# Altium PCB PCB1.PcbDoc
Units mm, origin at the board's own origin, x right, y up, seen from the top; angles counter-clockwise.
Board outline 152.4 x 101.6 mm, 2 copper layers (Top Layer, Bottom Layer); 57 components, 32 nets, 213 pads, 4 vias.
Unrouted connection lines stored in the file: 40.
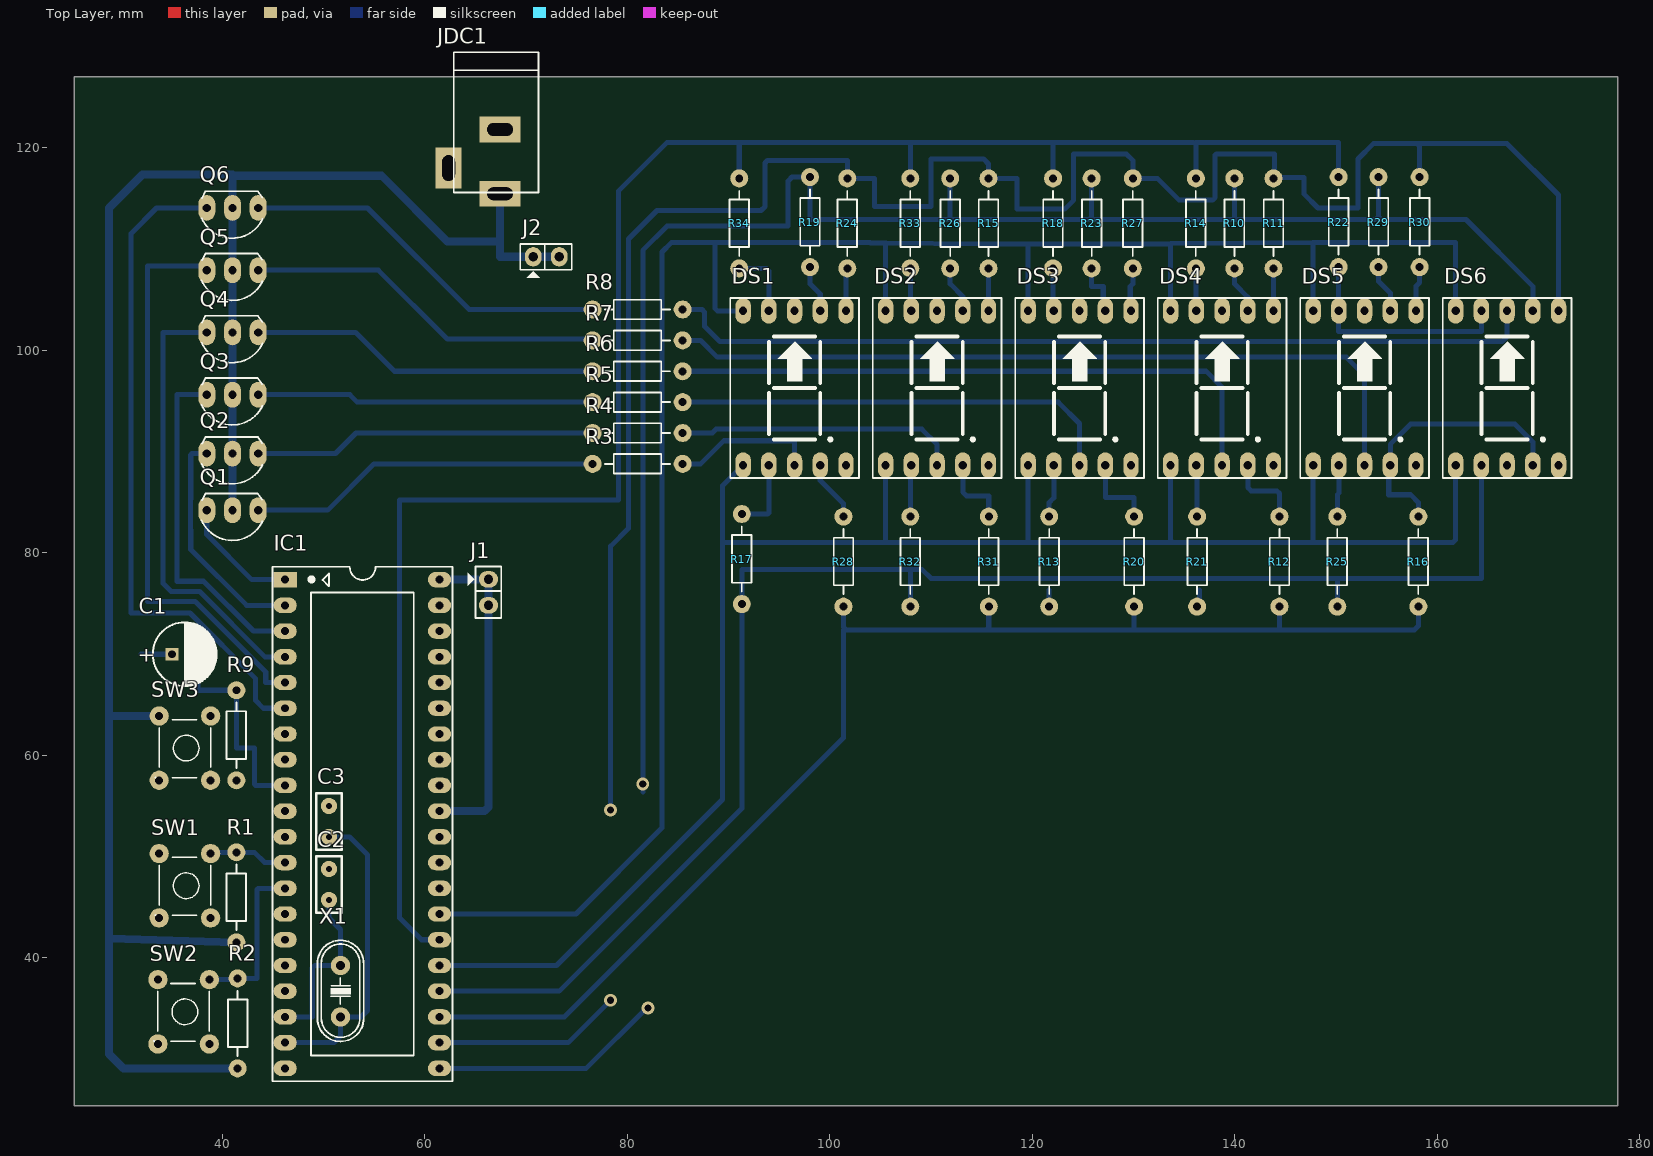
[diagram p0: Top Layer view]
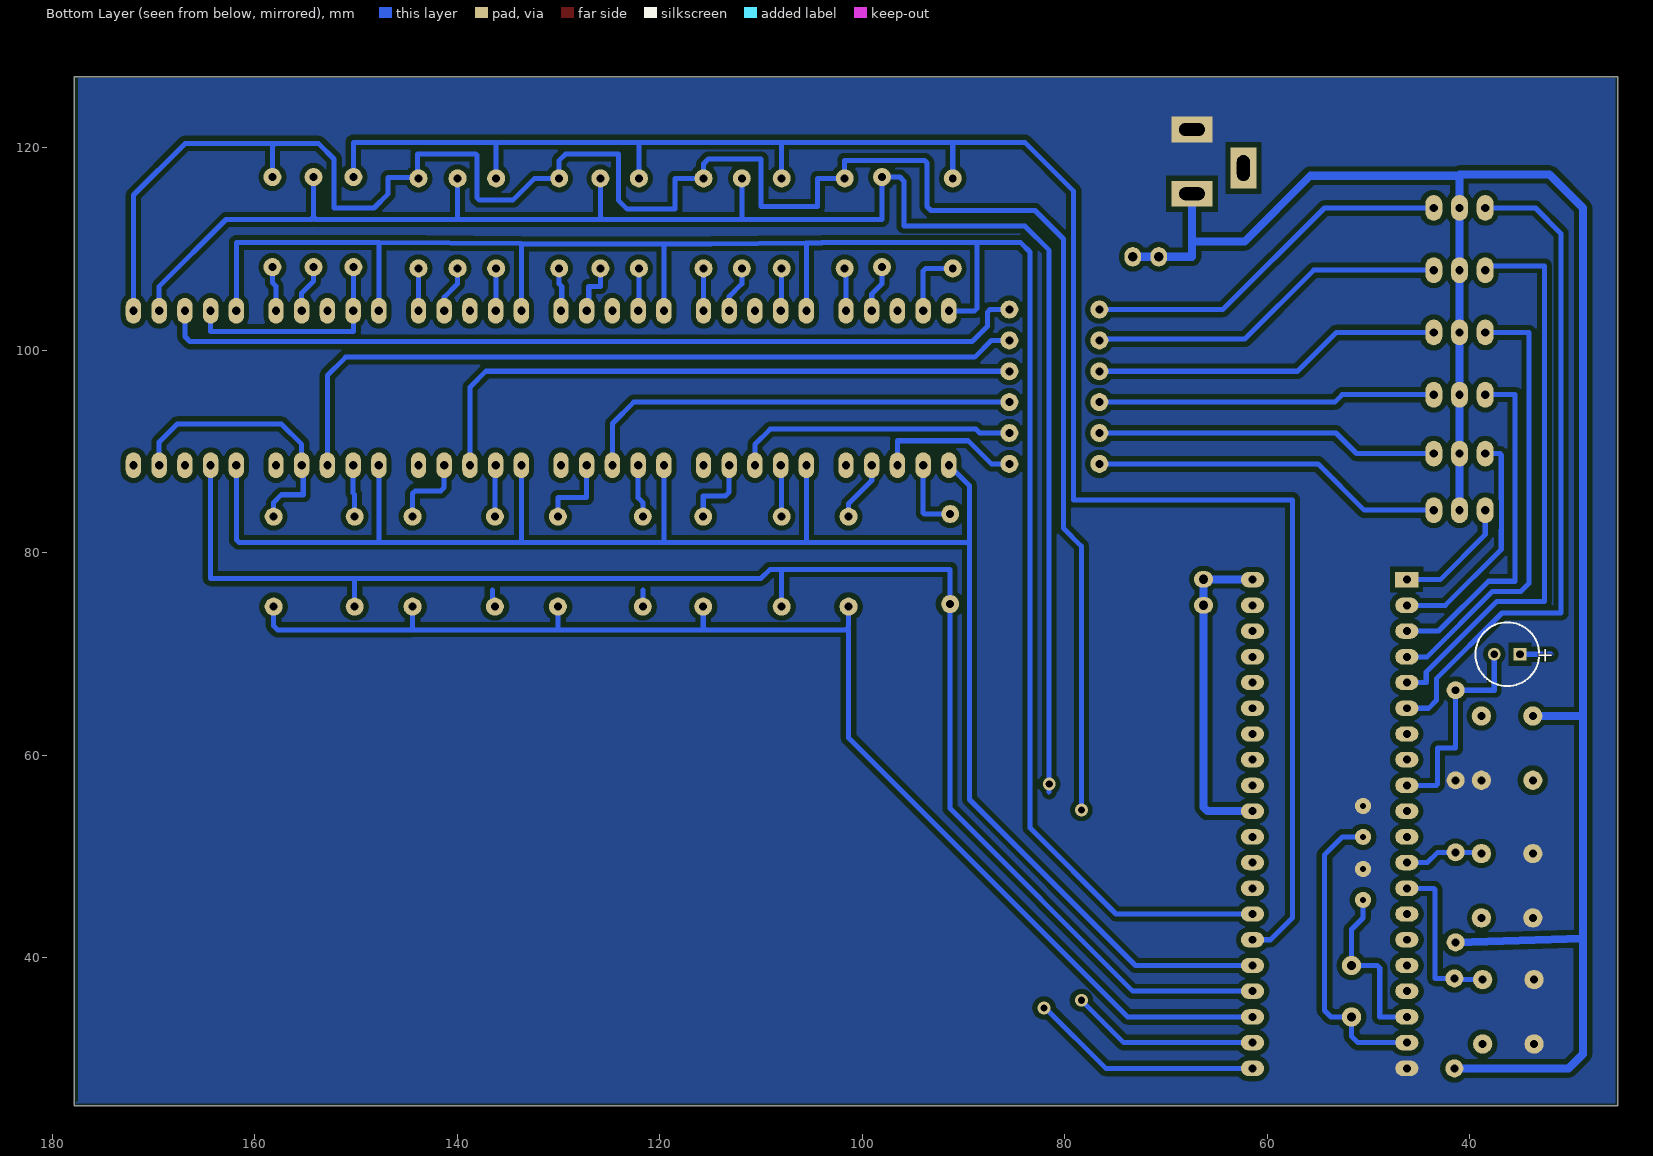
[diagram p1: Bottom Layer view, seen from below]
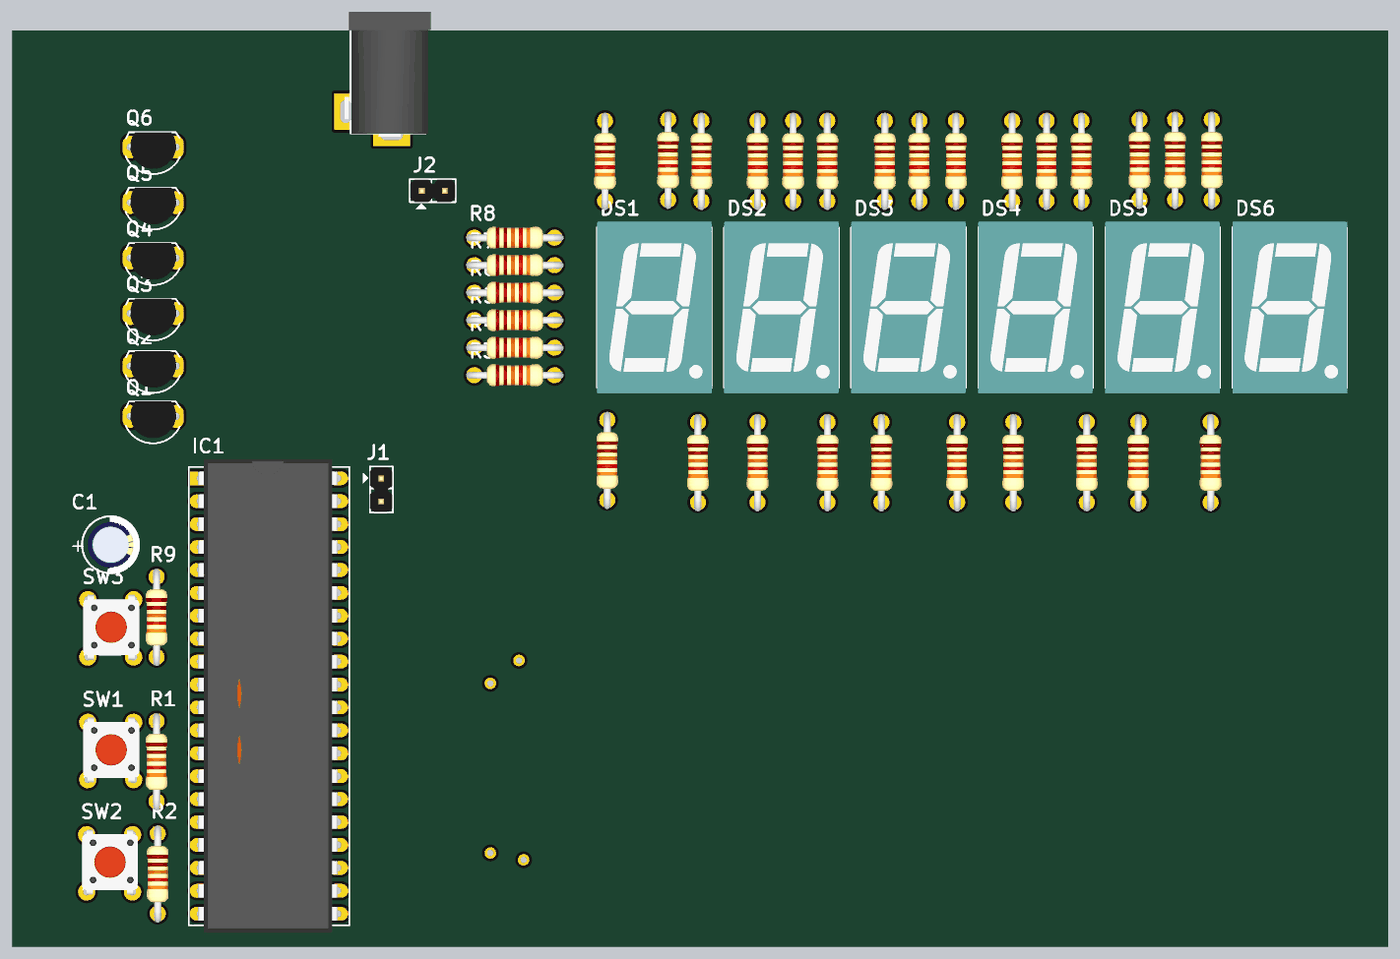
[diagram p2: 3D render of the assembled board from above, using the file's embedded part models]

## Layer stack, top to bottom
Top Solder: solder mask 0.0102, Solder Resist, Dk 3.5
Top Layer: signal copper 0.0356
Dielectric 1: dielectric 0.32, FR-4, Dk 4.8
Bottom Layer: signal copper 0.0356
Bottom Solder: solder mask 0.0102, Solder Resist, Dk 3.5

## Board outline
25.4,25.4 177.8,25.4 177.8,127 25.4,127

## Design rules (kind name [scope] priority, off if disabled: settings)
Clearance [All] p1: gap=0.5 ignorepadtopadclearanceinfootprint=FALSE
PlaneConnect [All] p1: planeconnectstyle=Relief reliefexpansion=0.508 reliefentries=4 reliefconductorwidth=0.5 reliefairgap=0.5
PolygonConnect [All] p1: connectstyle=Direct reliefconductorwidth=0.5 reliefentries=4 polygonreliefangle="90 Angle" airgapwidth=0.5
RoutingLayers [All] p1: top layer_v5=FALSE bottom layer_v5=TRUE
RoutingVias [All] p1: holewidth=0.711 width=1.27 viastyle="Through Hole" minholewidth=0.711 minwidth=1.27 maxholewidth=0.711 maxwidth=1.27
SolderMaskExpansion [All] p1: expansion=0.3
Width [All] p1: maxlimit=3 minlimit=0.5 preferedwidth=1
28 further rules are at their usual default settings.

## Components (designator, comment, footprint, x,y, rotation, side; value= is the part's Value field where it differs from the comment)
C1 "Cap Pol" "RADIAL C" 35.052,69.977 r0 top value=100uF
C2 "Cap Non-pol" "Cap Non-Pol 3mm" 50.546,47.244 r270 top value=100uF
C3 "Cap Non-pol" "Cap Non-Pol 3mm" 50.546,53.467 r270 top value=100uF
DS1 "7SEG S" 7SEGS 91.44,88.646 r0 top value="LED 7S SEG"
DS2 "7SEG S" 7SEGS 105.512,88.646 r0 top value="LED 7S SEG"
DS3 "7SEG S" 7SEGS 119.583,88.646 r0 top value="LED 7S SEG"
DS4 "7SEG S" 7SEGS 133.655,88.646 r0 top value="LED 7S SEG"
DS5 "7SEG S" 7SEGS 147.726,88.646 r0 top value="LED 7S SEG"
DS6 "7SEG S" 7SEGS 161.798,88.646 r0 top value="LED 7S SEG"
IC1 "AT89S52" DIP40/W0.6 46.228,77.343 r270 top
J1 "Jumper 2" JP2 66.294,77.368 r270 top value="JP 2"
J2 "Jumper 2" JP2 70.714,109.22 r0 top value="JP 2"
JDC1 "Jac DC" DC-IN 64.897,118.618 r270 top
Q1 "C1815" QTO-92 41.021,84.201 r180 top
Q2 "C1815" QTO-92 41.021,89.789 r180 top
Q3 "C1815" QTO-92 41.021,95.606 r180 top
Q4 "C1815" QTO-92 41.021,101.752 r180 top
Q5 "C1815" QTO-92 41.021,107.899 r180 top
Q6 "C1815" QTO-92 41.021,114.046 r180 top
R1 "1k" R1/4W 41.402,41.529 r90 top value="R1/4W - 1K"
R2 "1k" R1/4W 41.529,29.083 r90 top value="R1/4W - 1K"
R3 "1k" R1/4W 85.471,88.773 r180 top value="R1/4W - 1K"
R4 "1k" R1/4W 85.471,91.821 r180 top value="R1/4W - 1K"
R5 "1k" R1/4W 85.471,94.869 r180 top value="R1/4W - 1K"
R6 "1k" R1/4W 85.471,97.917 r180 top value="R1/4W - 1K"
R7 "1k" R1/4W 85.471,100.965 r180 top value="R1/4W - 1K"
R8 "1k" R1/4W 85.471,104.013 r180 top value="R1/4W - 1K"
R9 "1k" R1/4W 41.402,57.531 r90 top value="R1/4W - 1K"
R10 "1k" R1/4W 139.954,108.077 r90 top value="R1/4W - 1K"
R11 "1k" R1/4W 143.815,108.077 r90 top value="R1/4W - 1K"
R12 "1k" R1/4W 144.399,74.676 r90 top value="R1/4W - 1K"
R13 "1k" R1/4W 121.666,74.676 r90 top value="R1/4W - 1K"
R14 "1k" R1/4W 136.144,108.077 r90 top value="R1/4W - 1K"
R15 "1k" R1/4W 115.672,108.077 r90 top value="R1/4W - 1K"
R16 "1k" R1/4W 158.115,74.676 r90 top value="R1/4W - 1K"
R17 "1k" R1/4W 91.313,74.93 r90 top value="R1/4W - 1K"
R18 "1k" R1/4W 122.047,108.077 r90 top value="R1/4W - 1K"
R19 "1k" R1/4W 98.044,108.204 r90 top value="R1/4W - 1K"
R20 "1k" R1/4W 130.048,74.676 r90 top value="R1/4W - 1K"
R21 "1k" R1/4W 136.271,74.676 r90 top value="R1/4W - 1K"
R22 "1k" R1/4W 150.241,108.204 r90 top value="R1/4W - 1K"
R23 "1k" R1/4W 125.857,108.077 r90 top value="R1/4W - 1K"
R24 "1k" R1/4W 101.727,108.077 r90 top value="R1/4W - 1K"
R25 "1k" R1/4W 150.114,74.676 r90 top value="R1/4W - 1K"
R26 "1k" R1/4W 111.887,108.077 r90 top value="R1/4W - 1K"
R27 "1k" R1/4W 129.921,108.077 r90 top value="R1/4W - 1K"
R28 "1k" R1/4W 101.346,74.676 r90 top value="R1/4W - 1K"
R29 "1k" R1/4W 154.178,108.204 r90 top value="R1/4W - 1K"
R30 "1k" R1/4W 158.242,108.204 r90 top value="R1/4W - 1K"
R31 "1k" R1/4W 115.697,74.676 r90 top value="R1/4W - 1K"
R32 "1k" R1/4W 107.95,74.676 r90 top value="R1/4W - 1K"
R33 "1k" R1/4W 107.95,108.077 r90 top value="R1/4W - 1K"
R34 "1k" R1/4W 91.059,108.077 r90 top value="R1/4W - 1K"
SW1 "SW" SW4 38.862,50.292 r270 top value="Button chip 4 pin"
SW2 "SW" SW4 38.735,37.846 r270 top value="Button chip 4 pin"
SW3 "SW" SW4 38.862,63.881 r270 top value="Button chip 4 pin"
X1 "4Mhz" XT2 51.689,36.703 r270 top

## Footprints (in the part's own frame and the unit in brackets; to place one, negate y for a bottom-side part, rotate by r counter-clockwise, add the part's x,y. Pads: shape width x height; smd on the part's side, far side on the other; paste and mask are expansions set on the pad)
7SEGS [mil] "DIP 10 Leads; Body 12 x 15 mm; Pitch 0.5 mm"
  oval 60x100 hole 32: 1(0,0) 2(100,0) 3(200,0) 4(300,0) 5(400,0) 6(400,600) 7(300,600) 8(200,600) 9(100,600) 10(0,600)
  silkscreen extent -50,-50 450,650, body extent -50,-75 450,675, height 316
"Cap Non-Pol 3mm" [mm] "Capacitor, Radial; Body 5.6 x 2.5 mm (L x W typ); Pin Spacing 3 mm (typ); Solder Pad 35mil"
  round 1.6 hole 0.6: 1(-1.524,0) 2(1.524,0)
  silkscreen extent -2.79,-1.27 2.79,1.27, body extent -2.92,-0.83 2.92,0.86, height 6.22
DC-IN [mil] "Jac DC input"
  rect 100x160 hole 50 slot 100 at 90 deg: 1(125,100) 2(-125,100)
  rect 160x100 hole 50 slot 100 at 0 deg: 3(25,-100)
  silkscreen extent -425,-80 120,250, body extent -410,-105 134,269, height 434
DIP40/W0.6 [mil] "40 PIN, W 600mil, Pin to pin 100mil"
  rect 60x90 hole 31: 1(0,0)
  oval 60x90 hole 31: 2(100,0) 3(200,0) 4(300,0) 5(400,0) 6(500,0) 7(600,0) 8(700,0) 9(800,0) 10(900,0) 11(1000,0) 12(1100,0) 13(1200,0) 14(1300,0) 15(1400,0) 16(1500,0) 17(1600,0) 18(1700,0) 19(1800,0) 20(1900,0) 21(1900,600) 22(1800,600) 23(1700,600) 24(1600,600) 25(1500,600) 26(1400,600) 27(1300,600) 28(1200,600) 29(1100,600) 30(1000,600) 31(900,600) 32(800,600) 33(700,600) 34(600,600) 35(500,600) 36(400,600) 37(300,600) 38(200,600) 39(100,600) 40(0,600)
  silkscreen extent -50,-50 1950,650, body extent -82,-10 1982,600, height 224
JP2 [mil]
  oval 65x75 hole 36: 1(0,0) 2(101,0)
  silkscreen extent -50,-81 150,50, body extent -48,-50 148,48, height 323
QTO-92 [mil] "TO-92"
  oval 66x100 hole 32: 1(-100,0) 2(0,0) 3(100,0)
  silkscreen extent -117,-65 120,118, body extent -109,-66 109,95, height 245
R1/4W [mil] "R 1/4W, 2 Pin, 350mil"
  round 70 hole 31: 1(0,0) 2(350,0)
  silkscreen extent 48,-38 302,38, body extent -40,-47 386,47, height 111
"RADIAL C" [mm] "Capacitor, Electrolytic, Radial; Body 6.3 x 6.8 mm (Dia.xH typ); Pin Spacing 2.5 mm (typ)"
  rect 1.25x1.25 hole 0.75: 1(0,0)
  round 1.25 hole 0.75: 2(2.54,0)
  silkscreen extent -1.9,-3.15 4.4,3.15, body extent -1.27,-2.54 3.81,2.54, height 13.7
SW4 [mil] "SW button 4pin, 250 x250 mil"
  round 75 hole 31: 1(0,0) 2(250,-200) 3(250,0) 4(0,-200)
  silkscreen extent 15,-215 240,0, body extent -36,-220 276,24, height 276
XT2 [mil] "Footpin for Crystal 2 pin"
  round 75 hole 34: 1(-100,0) 2(100,0)
  silkscreen extent -198,-90 195,90, body extent -233,-93 213,90, height 138

## Part data
C1: "Polarized Capacitor", LatestRevisionDate=17-Jul-2002, LatestRevisionNote="Re-released for DXP Platform.", PackageReference=POLAR0.8, Published=8-Jun-2000, Publisher="Altium Limited"
C2 C3: "Non-polarized Capacitor", LatestRevisionDate=17-Jul-2002, LatestRevisionNote="Re-released for DXP Platform.", PackageReference=RAD-0.3, Published=8-Jun-2000, Publisher="Altium Limited"
DS1 DS2 DS3 DS4 DS5 DS6: library part LED7S, "Single 7 Seg Dipslay"
IC1: "AT89S52, 8k Byte Flash Memory , 40 Pin"
J1 J2: library part "JP 2"
JDC1: library part DCIN, "Jac DC input"
Q1 Q2 Q3 Q4 Q5 Q6: library part C1815_1, "NPN 600mW, ECB", =C2383
R1 R2 R3 R4 R5 R6 R7 R8 R9 R10 R11 R12 R13 R14 R15 R16 R17 R18 R19 R20 R21 R22 R23 R24 R25 R26 R27 R28 R29 R30 R31 R32 R33 R34: library part R1/4W, "Resistor 1/4W"
SW1 SW2 SW3: library part SW4, "Switch button 4 pin"
X1: library part XT2, "Crystal For all Crystal 2pin."

## Via types
v1: diameter 1.27, hole 0.711, Top Layer to Bottom Layer, 4 vias

## Nets (pads, with @x,y where several pads share a name; then routed paths per layer and width w, separated by ;. In a path a pad name is that pad's centre, name@x,y a point inside that pad or via, vN(x,y) a via of type N, cw(c..) or ccw(c..) an arc to the next point about the centre after c; other vN are vias at no path point)
a: DS1.7 DS2.7 DS3.7 DS4.7 DS5.7 DS6.7 IC1.21 R10.1 R10.2 R19.1 R19.2 R23.1 R23.2 R26.1 R26.2 R29.1 R29.2 | length 220.3
  Bottom Layer w0.5: IC1.21 75.946,29.083 81.915,35.052 v1(82.042,35.052) ; 81.534,56.388 81.534,109.855 83.947,112.268 95.885,112.268 95.885,116.713 96.266,117.094 R19.2 98.044,112.903 111.76,112.903 ; R19.1 98.044,106.553 99.06,105.537 DS1.7 ; R26.1 111.887,106.553 113.132,105.308 DS2.7 ; R26.2 111.887,113.03 111.76,112.903 ; 125.73,113.03 125.857,113.157 R23.2 ; R23.1 125.857,106.299 127,106.299 127,104.089 DS3.7 ; R10.1 139.954,106.553 141.275,105.232 DS4.7 ; R10.2 139.954,112.903 ; R29.1 154.178,106.807 155.346,105.639 DS5.7 ; 154.178,112.903 154.178,113.157 ; R29.2 154.178,113.157 ; DS6.7 169.418,106.299 162.814,112.903 154.432,112.903 154.178,113.157 ; 111.76,112.903 139.954,112.903 ; 139.954,112.903 153.924,112.903 154.178,113.157
  other v1: 81.534,57.15
b: DS1.6 DS2.6 DS3.6 DS4.6 DS5.6 DS6.6 IC1.22 R11.1 R11.2 R15.1 R15.2 R24.1 R24.2 R27.1 R27.2 R30.1 R30.2 | length 247.9
  Bottom Layer w0.5: IC1.22 74.168,31.623 v1(78.359,35.814) ; v1(78.359,54.61) 78.359,80.645 80.121,82.407 80.121,110.982 82.931,113.792 93.218,113.792 93.599,114.173 93.599,118.491 93.853,118.745 101.727,118.745 R24.2 104.394,116.967 104.394,114.173 109.982,114.173 109.982,118.872 115.189,118.872 115.672,118.389 R15.2 118.491,116.967 118.491,113.919 123.19,113.919 124.079,114.808 124.079,119.38 129.286,119.38 129.921,118.745 R27.2 132.334,116.967 134.493,114.808 137.795,114.808 138.049,115.062 138.049,119.253 138.176,119.38 143.891,119.38 R11.2@143.891,117.043 ; DS1.6 101.6,107.315 101.727,107.442 R24.1 ; DS2.6 R15.1 ; DS3.6 129.667,103.962 129.667,106.299 129.921,106.553 R27.1 ; DS4.6 R11.1 ; R11.2 R11.2@143.891,117.043 ; DS5.6 157.886,106.324 158.242,106.68 R30.1 ; R30.2 158.242,120.142 157.988,120.396 ; DS6.6 171.958,115.316 166.878,120.396 157.988,120.396 ; R11.2@143.891,117.043 146.812,117.043 146.812,115.443 148.209,114.046 152.146,114.046 152.146,118.872 153.67,120.396 157.988,120.396
c: DS1.4 DS2.4 DS3.4 DS4.4 DS5.4 DS6.4 IC1.23 R12.1 R12.2 R16.1 R16.2 R20.1 R20.2 R28.1 R28.2 R31.1 R31.2 | length 187.1
  Bottom Layer w0.5: IC1.23 73.787,34.163 101.346,61.722 101.346,72.39 101.6,72.39 ; DS1.4 99.06,87.122 101.346,84.836 R28.2 ; R28.1 101.346,72.644 101.6,72.39 ; DS2.4 113.132,85.979 113.513,85.598 115.697,85.598 R31.2 ; R31.1 115.697,72.644 115.443,72.39 ; DS3.4 127.203,85.446 130.048,85.446 R20.2 ; R20.1 130.048,72.517 129.921,72.39 ; DS4.4 141.275,86.436 141.605,86.106 144.145,86.106 144.399,85.852 R12.2 ; R12.1 144.399,72.517 144.526,72.39 ; R16.1 158.115,72.771 157.734,72.39 144.526,72.39 ; R16.2 158.115,84.963 157.353,85.725 155.194,85.725 155.194,88.494 DS5.4 155.346,90.703 157.353,92.71 167.64,92.71 169.418,90.932 DS6.4 ; 101.6,72.39 115.443,72.39 ; 115.443,72.39 129.921,72.39 ; 129.921,72.39 144.526,72.39
d: DS1.2 DS2.2 DS3.2 DS4.2 DS5.2 DS6.2 IC1.24 R13.1 R13.2 R17.1 R17.2 R21.1 R21.2 R25.1 R25.2 R32.1 R32.2 | length 183.6
  Bottom Layer w0.5: IC1.24 73.279,36.703 91.313,54.737 R17.1 91.313,78.359 107.95,78.359 ; R17.2 93.853,83.82 93.98,83.947 DS1.2 ; R32.1 107.95,78.359 ; R32.2 107.95,88.544 DS2.2 ; R13.1 121.666,76.327 ; R13.2 121.666,84.963 122.123,85.42 DS3.2 ; DS4.2 136.271,88.57 R21.2 ; R21.1 136.525,74.93 136.525,76.327 ; R25.1 150.114,77.47 ; R25.2 150.114,85.725 150.266,85.877 DS5.2 ; DS6.2@164.338,88.752 DS6.2 164.338,77.47 150.114,77.47 ; 107.95,78.359 109.093,78.359 109.982,77.47 150.114,77.47
e: DS1.1 DS2.1 DS3.1 DS4.1 DS5.1 DS6.1 IC1.25 | length 179
  Bottom Layer w0.5: IC1.25 73.025,39.243 89.408,55.626 89.408,81.026 ; DS1.1 89.408,86.614 89.408,81.026 ; DS2.1 105.512,81.051 105.537,81.026 ; DS3.1 119.583,81.077 119.634,81.026 ; DS4.1 133.655,81.229 133.858,81.026 ; DS5.1 147.726,81.026 ; DS6.1 161.798,81.28 161.544,81.026 147.726,81.026 ; 89.408,81.026 105.537,81.026 ; 105.537,81.026 119.634,81.026 ; 119.634,81.026 133.858,81.026 ; 133.858,81.026 147.726,81.026
f: DS1.9 DS2.9 DS3.9 DS4.9 DS5.9 DS6.9 IC1.26 R14.1 R14.2 R18.1 R18.2 R22.1 R22.2 R33.1 R33.2 R34.1 R34.2 | length 230.8
  Bottom Layer w0.5: IC1.26 59.69,41.783 57.531,43.942 57.531,85.217 79.121,85.217 79.121,115.697 83.947,120.523 91.059,120.523 ; R34.1 93.726,108.077 93.98,107.823 DS1.9 ; R34.2 91.059,120.523 ; R33.1 107.95,103.988 DS2.9 ; R33.2 107.95,120.523 ; R18.1 122.047,103.962 DS3.9 ; R18.2 122.047,120.523 ; 135.89,120.523 122.047,120.523 ; R14.1 136.144,103.937 DS4.9 ; R14.2 136.144,120.523 150.241,120.523 R22.2 ; R22.1 150.241,103.911 DS5.9 150.241,103.861 150.241,101.854 164.338,101.854 DS6.9 ; 91.059,120.523 107.95,120.523 ; 107.95,120.523 122.047,120.523
g: DS1.10 DS2.10 DS3.10 DS4.10 DS5.10 DS6.10 IC1.27 | length 205.4
  Bottom Layer w0.5: IC1.27 74.93,44.323 83.439,52.832 83.439,109.7 84.356,110.617 88.646,110.617 ; DS1.10 88.9,103.886 88.646,104.14 88.646,110.617 ; DS2.10 105.512,110.589 ; DS3.10 119.583,110.49 ; DS4.10 133.655,110.49 ; DS5.10 147.726,110.617 ; DS6.10 161.798,110.617 147.726,110.617 ; 88.646,110.617 103.988,110.617 104.002,110.603 ; 104.002,110.603 105.512,110.589 ; 104.002,110.603 105.512,110.603 105.512,110.589 ; 105.512,110.589 105.543,110.589 114.949,110.504 119.583,110.504 119.583,110.49 ; 119.583,110.49 133.655,110.49 ; 133.655,110.49 133.679,110.513 147.726,110.617
GND: C2.1 C3.1 IC1.20 JDC1.2 R9.1 SW1.2 SW1.4 SW2.2 SW2.4 SW3.3
INT0: IC1.12 R1.2 SW1.1 SW1.3 | length 7.8
  Bottom Layer w0.5: SW1.1 38.989,50.419 R1.2 43.18,50.419 44.196,49.403 IC1.12
INT1: IC1.13 R2.2 SW2.1 SW2.3 | length 16.4
  Bottom Layer w0.5: SW2.1 41.402,37.846 R2.2 43.434,37.973 43.434,46.736 43.561,46.863 IC1.13
L1: DS1.3 DS1.8 R3.1 | length 14.4
  Bottom Layer w0.5: R3.1 87.249,88.773 89.535,91.059 96.52,91.059 DS1.3
L2: DS2.3 DS2.8 R4.1 | length 28
  Bottom Layer w0.5: R4.1 88.392,91.821 88.773,92.202 109.093,92.202 110.592,90.703 DS2.3
L3: DS3.3 DS3.8 R5.1 | length 44.2
  Bottom Layer w0.5: R5.1 122.555,94.869 124.663,92.761 DS3.3
L4: DS4.3 DS4.8 R6.1 | length 61.6
  Bottom Layer w0.5: R6.1 137.16,97.917 138.735,96.342 DS4.3
L5: DS5.3 DS5.8 R7.1 | length 77.6
  Bottom Layer w0.5: R7.1 87.249,100.965 88.9,99.314 151.003,99.314 152.806,97.511 DS5.3
L6: DS6.3 DS6.8 R8.1 | length 86.3
  Bottom Layer w0.5: R8.1 87.376,104.013 87.646,103.743 87.646,102.346 89.154,100.838 166.37,100.838 166.878,101.346 DS6.8
NetC2_2: C2.2 IC1.18 X1.1 | length 17.3
  Bottom Layer w0.5: IC1.18 48.895,34.163 48.895,38.989 49.149,39.243 X1.1 51.689,42.799 50.546,43.942 C2.2
NetC3_2: C3.2 IC1.19 X1.2 | length 30.5
  Bottom Layer w0.5: IC1.19 51.054,31.623 51.689,32.258 X1.2 53.721,34.163 54.356,34.798 54.356,50.165 52.578,51.943 C3.2
NetQ1_1: Q1.1 R3.2 | length 34.9
  Bottom Layer w0.5: Q1.1 50.419,84.201 54.991,88.773 R3.2
NetQ2_1: Q2.1 R4.2 | length 33.9
  Bottom Layer w0.5: Q2.1 51.181,89.789 53.213,91.821 R4.2
NetQ3_1: Q3.1 R5.2 | length 33.3
  Bottom Layer w0.5: Q3.1 52.603,95.606 53.34,94.869 R5.2
NetQ4_1: Q4.1 R6.2 | length 34.6
  Bottom Layer w0.5: Q4.1 53.188,101.752 57.023,97.917 R6.2
NetQ5_1: Q5.1 R7.2 | length 35.9
  Bottom Layer w0.5: Q5.1 55.423,107.899 62.23,101.092 76.454,101.092 R7.2
NetQ6_1: Q6.1 R8.2 | length 37.2
  Bottom Layer w0.5: Q6.1 54.356,114.046 64.389,104.013 R8.2
RS: C1.2 IC1.9 R9.2 | length 21.5
  Bottom Layer w0.5: C1.2 37.592,66.421 R9.2 41.402,60.706 43.18,60.706 43.18,57.15 43.307,57.023 IC1.9
T1: IC1.1 Q1.3 | length 12
  Bottom Layer w0.5: Q1.3 38.481,81.788 42.926,77.343 IC1.1
T2: IC1.2 Q2.3 | length 22.6
  Bottom Layer w0.5: Q2.3 37.027,89.789 36.9,89.662 36.9,85.297 36.893,85.291 36.893,82.222 36.9,82.216 36.9,80.321 42.418,74.803 IC1.2
T3: IC1.3 Q3.3 | length 34.1
  Bottom Layer w0.5: Q3.3 38.472,95.615 35.56,95.615 35.56,77.184 38.166,77.184 43.087,72.263 IC1.3
T4: IC1.4 Q4.3 | length 44.2
  Bottom Layer w0.5: Q4.3 34.163,101.752 34.163,76.974 34.953,76.184 37.752,76.184 44.213,69.723 IC1.4
T5: IC1.5 Q5.3 | length 56.7
  Bottom Layer w0.5: Q5.3 38.049,108.331 32.639,108.331 32.639,75.184 37.338,75.184 44.307,68.215 44.307,67.199 44.323,67.183 IC1.5
T6: IC1.6 Q6.3 | length 66.4
  Bottom Layer w0.5: Q6.3 33.528,114.046 30.988,111.506 30.988,74.041 36.83,74.041 43.307,67.564 43.307,65.405 44.069,64.643 IC1.6
VCC: C1.1 IC1.31 IC1.40 J1.1 J1.2 J2.1 J2.2 JDC1.1 Q1.2 Q2.2 Q3.2 Q4.2 Q5.2 Q6.2 R1.1 R2.1 SW3.4 | length 237.8
  Bottom Layer w0.5: 32.004,69.977 C1.1
  Bottom Layer w0.8: SW3.4 29.083,63.881 28.829,63.627 ; Q1.2 Q2.2 Q3.2 Q4.2 Q5.2 Q6.2 41.021,117.348 ; R1.1 28.829,41.91 ; R2.1 30.245,29.083 28.829,30.499 28.829,41.91 ; IC1.31 65.913,54.483 66.294,54.864 J1.2 J1.1 61.493,77.368 IC1.40 ; JDC1.1 67.437,110.744 ; J2.2 J2.1 67.437,109.22 67.437,110.744 ; 28.829,41.91 28.829,63.627 ; 28.829,63.627 28.829,75.802 28.829,114.046 32.131,117.348 41.021,117.348 ; 41.021,117.348 41.148,117.221 55.753,117.221 62.23,110.744 67.437,110.744
pads on no net: DS1.5 DS2.5 DS3.5 DS4.5 DS5.5 DS6.5 IC1.7 IC1.8 IC1.10 IC1.11 IC1.14 IC1.15 IC1.16 IC1.17 IC1.28 IC1.29 IC1.30 IC1.32 IC1.33 IC1.34 IC1.35 IC1.36 IC1.37 IC1.38 IC1.39 JDC1.3 SW3.1 SW3.2

## Polygon pours and split planes (outlines as drawn)
GND on Bottom Layer (solid, pour order 10): 177.8,25.527 177.419,25.908 177.419,126.873 25.781,126.873 25.654,127 25.654,25.654 177.292,25.654

## Text inside footprints (layer, text, board x,y; h text height)
C1: Top Overlay "+" at 31.677,69.227 h1.5; Bottom Overlay "+" at 31.677,69.227 h1.5